# EAGLE board Connectors-MK2 (EAGLE 9.6.2)
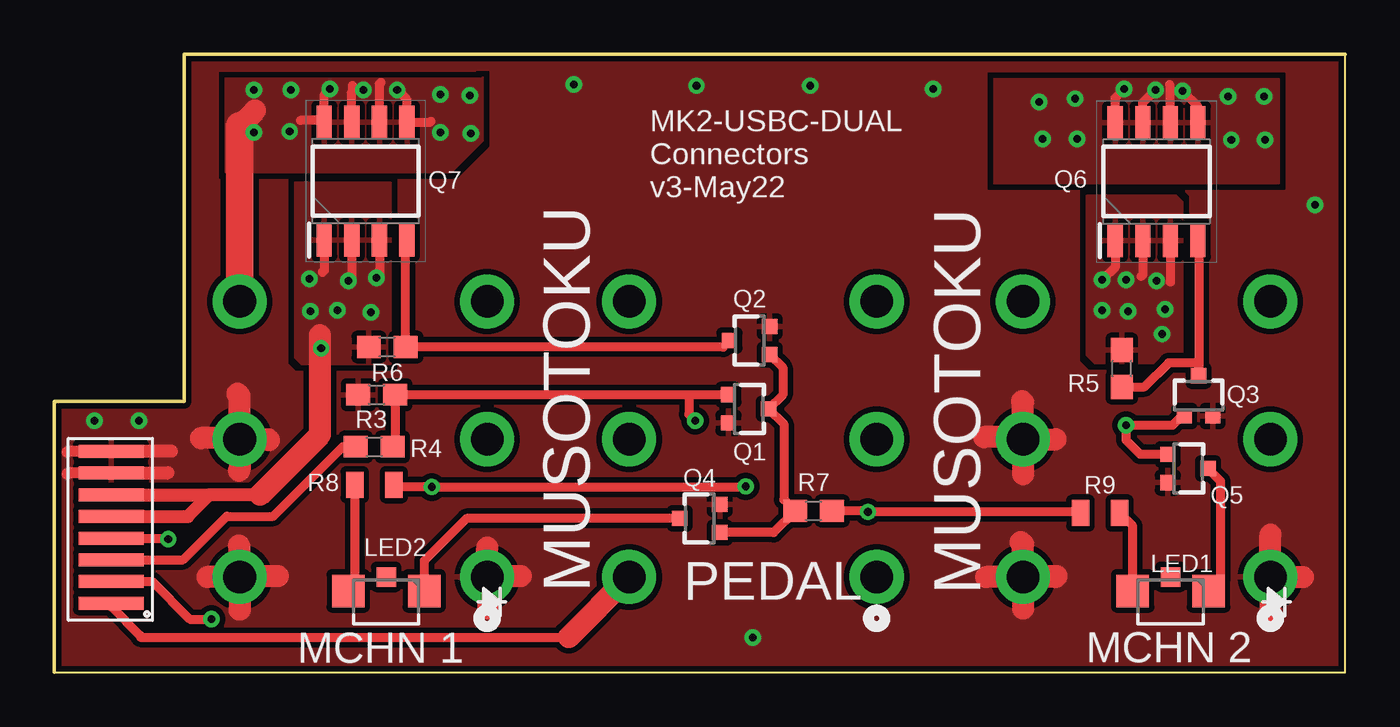
[diagram p0: board, top side]
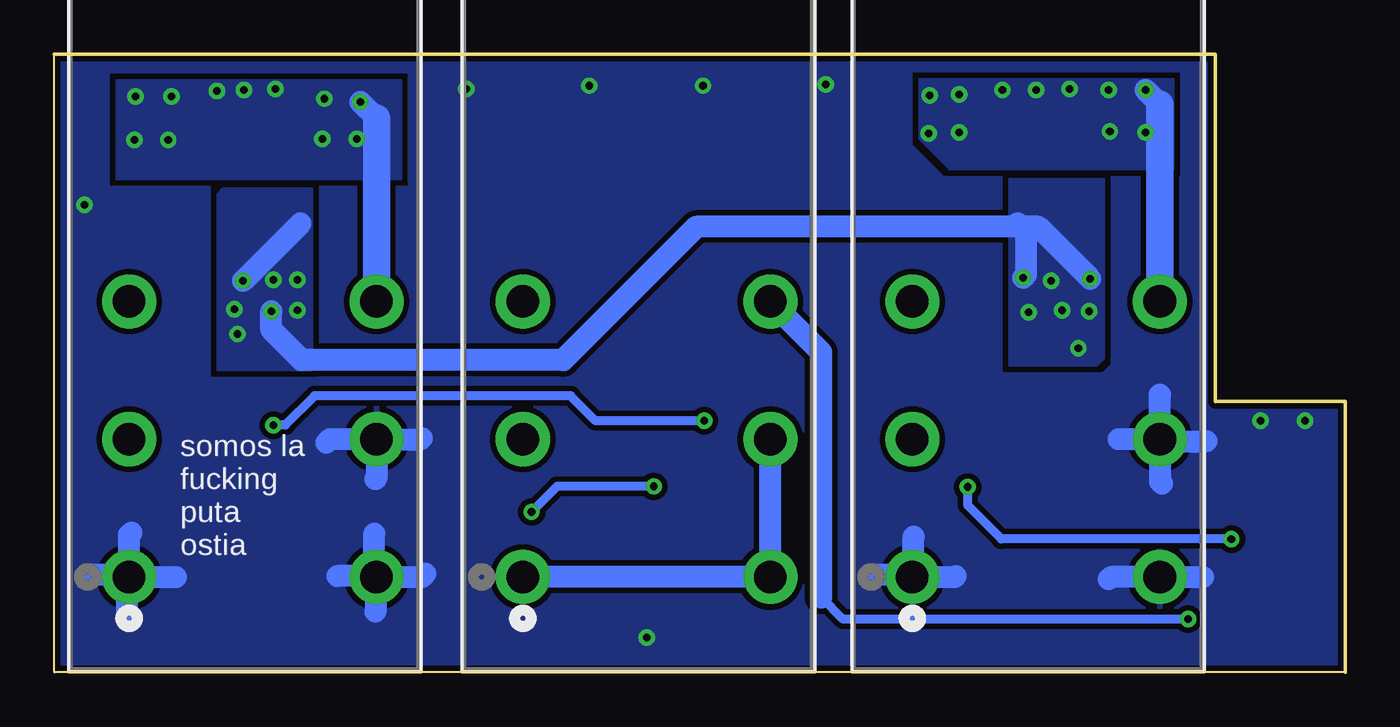
[diagram p1: board, bottom side, seen from below]

Size 59.5 x 28.5 mm. Coordinates in mm from the lower left corner, seen from the top.
Outline: 0,0 59.5,0 59.5,28.5 6,28.5 6,12.5 0,12.5 0,0
Copper layers (1*16): Top 0.035mm / dielectric 1.5mm / Bottom 0.035mm
Design rules "default *": minimum track width 6mil, minimum drill 0.35mm, track to track 6mil, track to pad 6mil, pad to pad 6mil, via to via 6mil, smd to smd 6mil, copper to edge 10mil, drill to drill 6mil, minimum pad ring 10mil, minimum via ring 8mil, stop-mask expansion 4mil, vias tented up to drill 0mil, thermal gap 10mil

## Footprints (pad centres in the part's own frame; a part is rotated, then mirrored left to right if it is on the bottom)
FLEX8 = smd 0.6 x 3: 1 0.8,2.05; 2 1.8,2.05; 3 2.8,2.05; 4 3.8,2.05; 5 4.8,2.05; 7 5.8,2.05; 8 6.8,2.05; 9 7.8,2.05
LED_APA3010SRCPRV-GX_KNB = smd 1.499 x 1.499: 1 -0.5,1.75; 2 -0.5,-1.75 | smd 0.9 x 0.9: 3 -1.15,0
CONN_MHDR_AMP = drill 1.5 pad 2.5: 1 0,0; 2 -6.35,0; 3 -12.7,0; 4 0,11.405; 5 -6.35,11.405; 6 -12.7,11.405
SOT323 = smd 0.7 x 0.7: 1 -0.65,-0.925; 2 0.65,-0.925; 3 0,0.925
SOIC127P600X175-8N = smd 1.525 x 0.7: 1 -2.712,1.905; 2 -2.712,0.635; 3 -2.712,-0.635; 4 -2.712,-1.905; 5 2.712,-1.905; 6 2.712,-0.635; 7 2.712,0.635; 8 2.712,1.905
0603 = smd 1.1 x 1: 1 -0.85,0; 2 0.85,0
0805 = smd 0.8 x 1.2: 1 -0.9,0; 2 0.9,0

## Placement (x,y rotation side)
K1  FLEX8  [FLEX8]  4.67,2.39 90 top
LED1  APA3010SRCPRV-GX  [LED_APA3010SRCPRV-GX_KNB]  51.45,3.25 270 top
LED2  APA3010SRCPRV-GX  [LED_APA3010SRCPRV-GX_KNB]  15.3,3.25 270 top
MACHINE1  ACJS-MHDR  [CONN_MHDR_AMP]  19.95,4.4 270 bottom
MACHINE2  ACJS-MHDR  [CONN_MHDR_AMP]  56.05,4.4 270 bottom
PEDAL  ACJS-MHDR  [CONN_MHDR_AMP]  37.9,4.4 270 bottom
Q1  310mA/60V/1.6Ω  [SOT323]  32,12.15 270 top
Q2  310mA/60V/1.6Ω  [SOT323]  32.05,15.3 90 top
Q3  310mA/60V/1.6Ω  [SOT323]  52.74,12.75 0 top
Q4  310mA/60V/1.6Ω  [SOT323]  29.75,7.1 90 top
Q5  310mA/60V/1.6Ω  [SOT323]  52.25,9.4 270 top
Q6  SI4459ADY-T1-GE3  [SOIC127P600X175-8N]  50.8,22.63 90 top
Q7  SI4459ADY-T1-GE3  [SOIC127P600X175-8N]  14.35,22.65 90 top
R3  [0603]  14.86,12.8 0 top
R4  [0603]  14.74,10.4 180 top
R5  [0603]  49.2,14.01 90 top
R6  [0603]  15.35,15 180 top
R7  [0603]  35,7.45 0 top
R8  [0805]  14.75,8.65 180 top
R9  [0805]  48.2,7.35 0 top

## Library data of the parts
K1 = Flex_3mm
LED1 LED2 = APA3010 Led; BUILT_BY: EMA_Cory; COPYRIGHT: Copyright (C) 2018 Accelerated Designs. All rights reserved; DATASHEET: https://www.kingbrightusa.com/images/catalog/SPEC/APA3010SRCPRV-GX.pdf; MANUFACTURER_PART_NUMBER: APA3010SRCPRV-GX; SOURCELIBRARY: Add_to_database_2020-11-13; VENDOR: Kingbright
MACHINE1 MACHINE2 PEDAL = ACJSMHDR; BUILT_BY: EMA_Matt; COPYRIGHT: Copyright (C) 2018 Accelerated Designs. All rights reserved; MANUFACTURER_PART_NUMBER: ACJS-MHDR; SOURCELIBRARY: Amphenol_2019-10-30; VENDOR: Amphenol
Q1-Q5 = SparkFun-DiscreteSemi; PROD_ID: TRANS-11151
Q6 Q7 = SI4459ADY-T1-GE3; ARROW_PART_NUMBER: SI4459ADY-T1-GE3; ARROW_PRICE-STOCK: https://www.arrow.com/en/products/si4459ady-t1-ge3/vishay; DESCRIPTION: Trans MOSFET P-CH 30V 29A 8-Pin SOIC N T/R; HEIGHT: 1.75mm; MANUFACTURER_NAME: Vishay; MANUFACTURER_PART_NUMBER: SI4459ADY-T1-GE3; MOUSER_PART_NUMBER: 781-SI4459ADY-T1-GE3; MOUSER_PRICE-STOCK: https://www.mouser.co.uk/ProductDetail/Vishay-Semiconductors/SI4459ADY-T1-GE3?qs=IRuQNBqMOcnyBuDcl66N0Q%3D%3D
R3-R9 = SparkFun-Resistors

## Nets
!SEL!: Q1.3 Q2.1 Q4.1 R7.1
GND: K1.8 K1.9 MACHINE1.1 MACHINE1.4 MACHINE1.5 MACHINE2.1 MACHINE2.4 MACHINE2.5 Q1.2 Q2.2 Q3.2 Q4.2 Q5.2 R3.1
MACHINE_1: MACHINE1.6 Q7.5 Q7.6 Q7.7 Q7.8
MACHINE_2: MACHINE2.6 Q6.5 Q6.6 Q6.7 Q6.8
N$4: Q2.3 Q7.4 R6.1
N$5: Q3.3 Q6.4 R5.1
N$6: LED2.2 R8.2
N$7: LED2.1 Q4.3
N$9: LED1.2 R9.2
N$10: LED1.1 Q5.3
P+: K1.2 PEDAL.6
P-: K1.1 PEDAL.1 PEDAL.4 PEDAL.5
SEL: K1.3 R4.2
SEL_IN: Q1.1 Q3.1 Q5.1 R3.2 R4.1
VCC: K1.4 R7.2 R8.1 R9.1
VOUT: K1.5 K1.7 Q6.1 Q6.2 Q6.3 Q7.1 Q7.2 Q7.3 R5.2 R6.2

## Tracks (layer width: path | path; a pad name or v marks a point on that pad's centre or on a via)
!SEL!
  Top 0.406: Q2.1 33.58,14.05 33.58,12.8 Q1.3 33.62,11.45 33.62,7.98 R7.1 33.15,6.45 Q4.1
GND  (via drill 0.35)
  Top 0.508: K1.9 0.62,10.19 0.58,10.15 | K1.8 0.62,9.19 0.58,9.15
  Top 0.61: K1.9 5.4,10.2 | K1.8 5.25,9.2
  Top 1.016: MACHINE1.4 8.55,5.8 8.5,5.85 | MACHINE1.4 8.59,4.45 10.3,4.45 | MACHINE1.4 8.55,2.91 8.55,2.9 | MACHINE1.4 7.05,4.4 | MACHINE1.5 8.55,12.75 8.45,12.85 | MACHINE1.5 8.49,10.8 6.75,10.8 | MACHINE1.5 8.55,9.34 8.5,9.3 | MACHINE1.5 9.85,10.75 9.9,10.7 | MACHINE1.1 19.95,5.75 | MACHINE1.1 20,4.45 21.5,4.45 | MACHINE1.1 20,4.35 20,2.95 | MACHINE2.4 44.64,5.91 44.55,6 | MACHINE2.4 44.69,4.45 46.2,4.45 46.15,4.4 MACHINE2.4 | MACHINE2.4 44.65,2.95 | MACHINE2.4 42.95,4.4 | MACHINE2.5 44.64,9.16 44.65,9.15 | MACHINE2.5 46.15,10.75 | MACHINE2.5 44.64,12.45 44.6,12.5 | MACHINE2.5 44.55,10.85 42.85,10.85 | MACHINE2.1 56.05,2.55 56,2.5 | MACHINE2.1 57.55,4.4 | MACHINE2.1 56.05,6.35
  Bottom 1.016: MACHINE1.5 8.55,12.8 | MACHINE1.5 10.45,10.75 | MACHINE1.5 8.55,8.8 8.45,8.7 | MACHINE1.5 8.45,10.65 6.4,10.65 | 10.9,4.3 10.8,4.4 MACHINE1.4 6.55,4.4 | MACHINE1.1 20.05,4.5 21.9,4.5 | MACHINE1.1 18,4.4 17.95,4.45 | MACHINE1.1 19.9,4.45 19.9,6.25 | MACHINE2.4 44.69,4.45 46.45,4.45 | MACHINE2.4 44.75,4.5 44.75,6.4 | MACHINE2.4 42.55,4.4 42.4,4.55 | MACHINE2.4 44.7,4.34 44.7,2.8 | MACHINE2.5 46.8,10.75 46.95,10.6 | MACHINE2.5 42.6,10.75 42.55,10.8 | MACHINE2.5 44.64,8.95 44.7,8.9 | MACHINE2.1 53.9,4.4 | MACHINE2.1 56.05,6.35 55.95,6.45 | MACHINE2.1 56.15,4.5 57.85,4.5 | MACHINE2.1 56.15,4.3 56.15,2.55
  other vias: 1.85,11.6 3.9,11.6 23.95,27.1 34.85,27.05 29.6,27.05 40.5,26.9 58.1,21.55 32.2,1.6
  pour Top (isolate 0.254, rank 2): -2.35,-0.3 61.5,-0.3 61.5,32.83 -2.35,32.83
  pour Bottom (isolate 0.254, rank 2): -1.45,-1.15 62.45,-1.15 62.45,31.13 -1.45,31.13
MACHINE_1  (via drill 0.35)
  Top 0.406: v12.7,26.9 12.45,26.65 Q7.8 12.36,25.45 11.35,25.45 | Q7.7 13.72,26.77 13.75,26.8 13.75,27.05 | Q7.6 14.98,27.13 15.05,27.2 | v15.8,26.85 16.26,26.4 Q7.5 17.31,25.36 17.35,25.4
  Top 1.016: 8.55,25.2 9.25,25.9
  Top 1.27: MACHINE1.6 8.55,25.2
  Bottom 1.016: 8.55,26.2 v9.2,26.85
  Bottom 1.27: MACHINE1.6 8.55,26.2
  other vias: 10.9,26.85 9.2,24.9 10.85,24.95 14.25,26.85 17.8,26.65 19.15,26.6 19.2,24.85 17.8,24.9
  pour Top: 7.9,27.4 19.7,27.4 19.75,27.45 19.75,24.5 18.3,23.05 7.9,23.05
  pour Bottom: 7.9,27.35 19.65,27.35 19.65,24.6 18.25,23.2 7.9,23.2
MACHINE_2  (via drill 0.35)
  Top 0.406: Q6.8 48.89,26.49 v49.3,26.9 | Q6.7 50.17,26.27 v50.75,26.85 | Q6.6 51.44,27.06 51.4,27.1 | Q6.5 52.7,26.09 v52,26.8
  Bottom 1.016: 44.64,25.55 v45.4,26.3
  Bottom 1.27: MACHINE2.6 44.64,25.55
  other vias: 47.05,26.45 45.55,24.6 47.15,24.6 54.1,26.55 55.75,26.55 54.25,24.55 55.8,24.55
  pour Top: 43.3,22.55 56.45,22.55 56.45,27.35 43.3,27.35
  pour Bottom: 56.65,22.75 43.5,22.75 43.5,27.3 56.65,27.3
N$4
  Top 0.406: Q2.3 30.83,15 R6.1 16.2,19.88 Q7.4
N$5
  Top 0.406: Q6.4 52.74,19.88 Q3.3 52.74,14.12 52.59,14.27 51.36,14.27 50.25,13.16 R5.1
N$6
  Top 0.406: R8.2 13.85,4.25 13.95,4.15 LED2.2
N$7
  Top 0.406: Q4.3 19,7.1 17.05,5.15 LED2.1
N$9
  Top 0.406: LED1.2 49.7,6.75 R9.2
N$10
  Top 0.406: Q5.3 53.75,8.82 53.75,4.3 LED1.1
P+  (via drill 0.35)
  Top 0.406: K1.2 4.51,4.19 6.25,2.45 v7.25,2.45
  Bottom 0.406: v7.25,2.45 23.15,2.45 24.15,3.45
  Bottom 1.016: 24.15,3.45 24.15,14.76 PEDAL.6
P-
  Top 0.406: K1.1 2.62,3.04 3.97,1.69 3.97,1.62 23.72,1.62
  Top 1.016: 23.72,1.62 PEDAL.4
  Bottom 1.016: PEDAL.1 PEDAL.4 PEDAL.5
SEL
  Top 0.406: K1.3 5.94,5.19 7.95,7.2 10.1,7.2 13.3,10.4 R4.2
SEL_IN  (via drill 0.35)
  Top 0.406: Q1.1 29.25,12.8 | 29.25,12.8 R3.2 15.71,10.52 R4.1 | 29.25,12.8 29.25,11.9 v29.55,11.6 | Q5.1 50.05,10.05 49.4,10.7 v49.4,11.4 51.55,11.4 51.97,11.82 Q3.1
  Bottom 0.406: v29.55,11.6 34.55,11.6 35.7,12.75 47.5,12.75 48.85,11.4 v49.4,11.4
VCC  (via drill 0.35)
  Top 0.406: K1.4 5.21,6.19 v5.25,6.15 | R8.1 15.75,8.55 v17.4,8.55 31.75,8.55 31.8,8.5 v31.88,8.57 | 35.9,7.4 R7.2 37.45,7.45 v37.5,7.4 47.25,7.4 R9.1
  Bottom 0.406: v5.25,6.15 15.85,6.15 17.4,7.7 v17.4,8.55 | v31.88,8.57 36.33,8.57 v37.5,7.4
VOUT  (via drill 0.35)
  Top 0.406: Q7.1 12.45,18.55 12.35,18.45 | Q7.2 13.72,18.22 v13.55,18.05 | Q7.3 14.98,18.34 v14.85,18.2 | Q6.1 48.89,18.7 v48.3,18.1 | Q6.2 50.17,18.31 50.1,18.25 | Q6.3 51.44,18.02 51.45,18
  Top 0.61: K1.7 7.15,8.19 | K1.5 6.15,7.19 7.15,8.19 | 9.49,8.19 7.15,8.19
  Top 1.016: 12.25,15.55 12.25,10.95 9.49,8.19
  Bottom 1.016: v14.85,18.2 14.7,18.35 14.7,20.3 15.1,20.7 | 48.15,20.7 v50.8,18.05 | v11.75,18.15 14.15,20.55 29.9,20.55 36.05,14.4 48.1,14.4 49.5,15.8 v49.5,16.65
  other vias: 49.4,18.1 51.2,16.75 51.05,15.6 48.3,16.7 14.6,16.6 13.05,16.7 12.3,14.95 11.8,16.65
  pour Top (isolate 0.254): 11.1,22.6 15.5,22.6 15.5,14.2 11.4,14.2 11.1,14.5
  pour Top (isolate 0.254): 47.6,22 51.7,22 52,21.7 52,14.25 47.95,14.25 47.6,14.6
  pour Bottom (isolate 0.254): 47.6,22.3 51.75,22.3 52,22.05 52,13.95 47.6,13.95
  pour Bottom (isolate 0.254): 11.1,22.75 15.5,22.75 15.5,14.15 11.45,14.15 11.1,14.5

## Text on the board
tNames: MK2-USBC-DUAL / Connectors / v3-May22 | MUSOTOKU | PEDAL | MUSOTOKU | MCHN 1 | MCHN 2
bNames: somos la / fucking / puta / ostia